# EAGLE board brd1 (EAGLE 6.4)
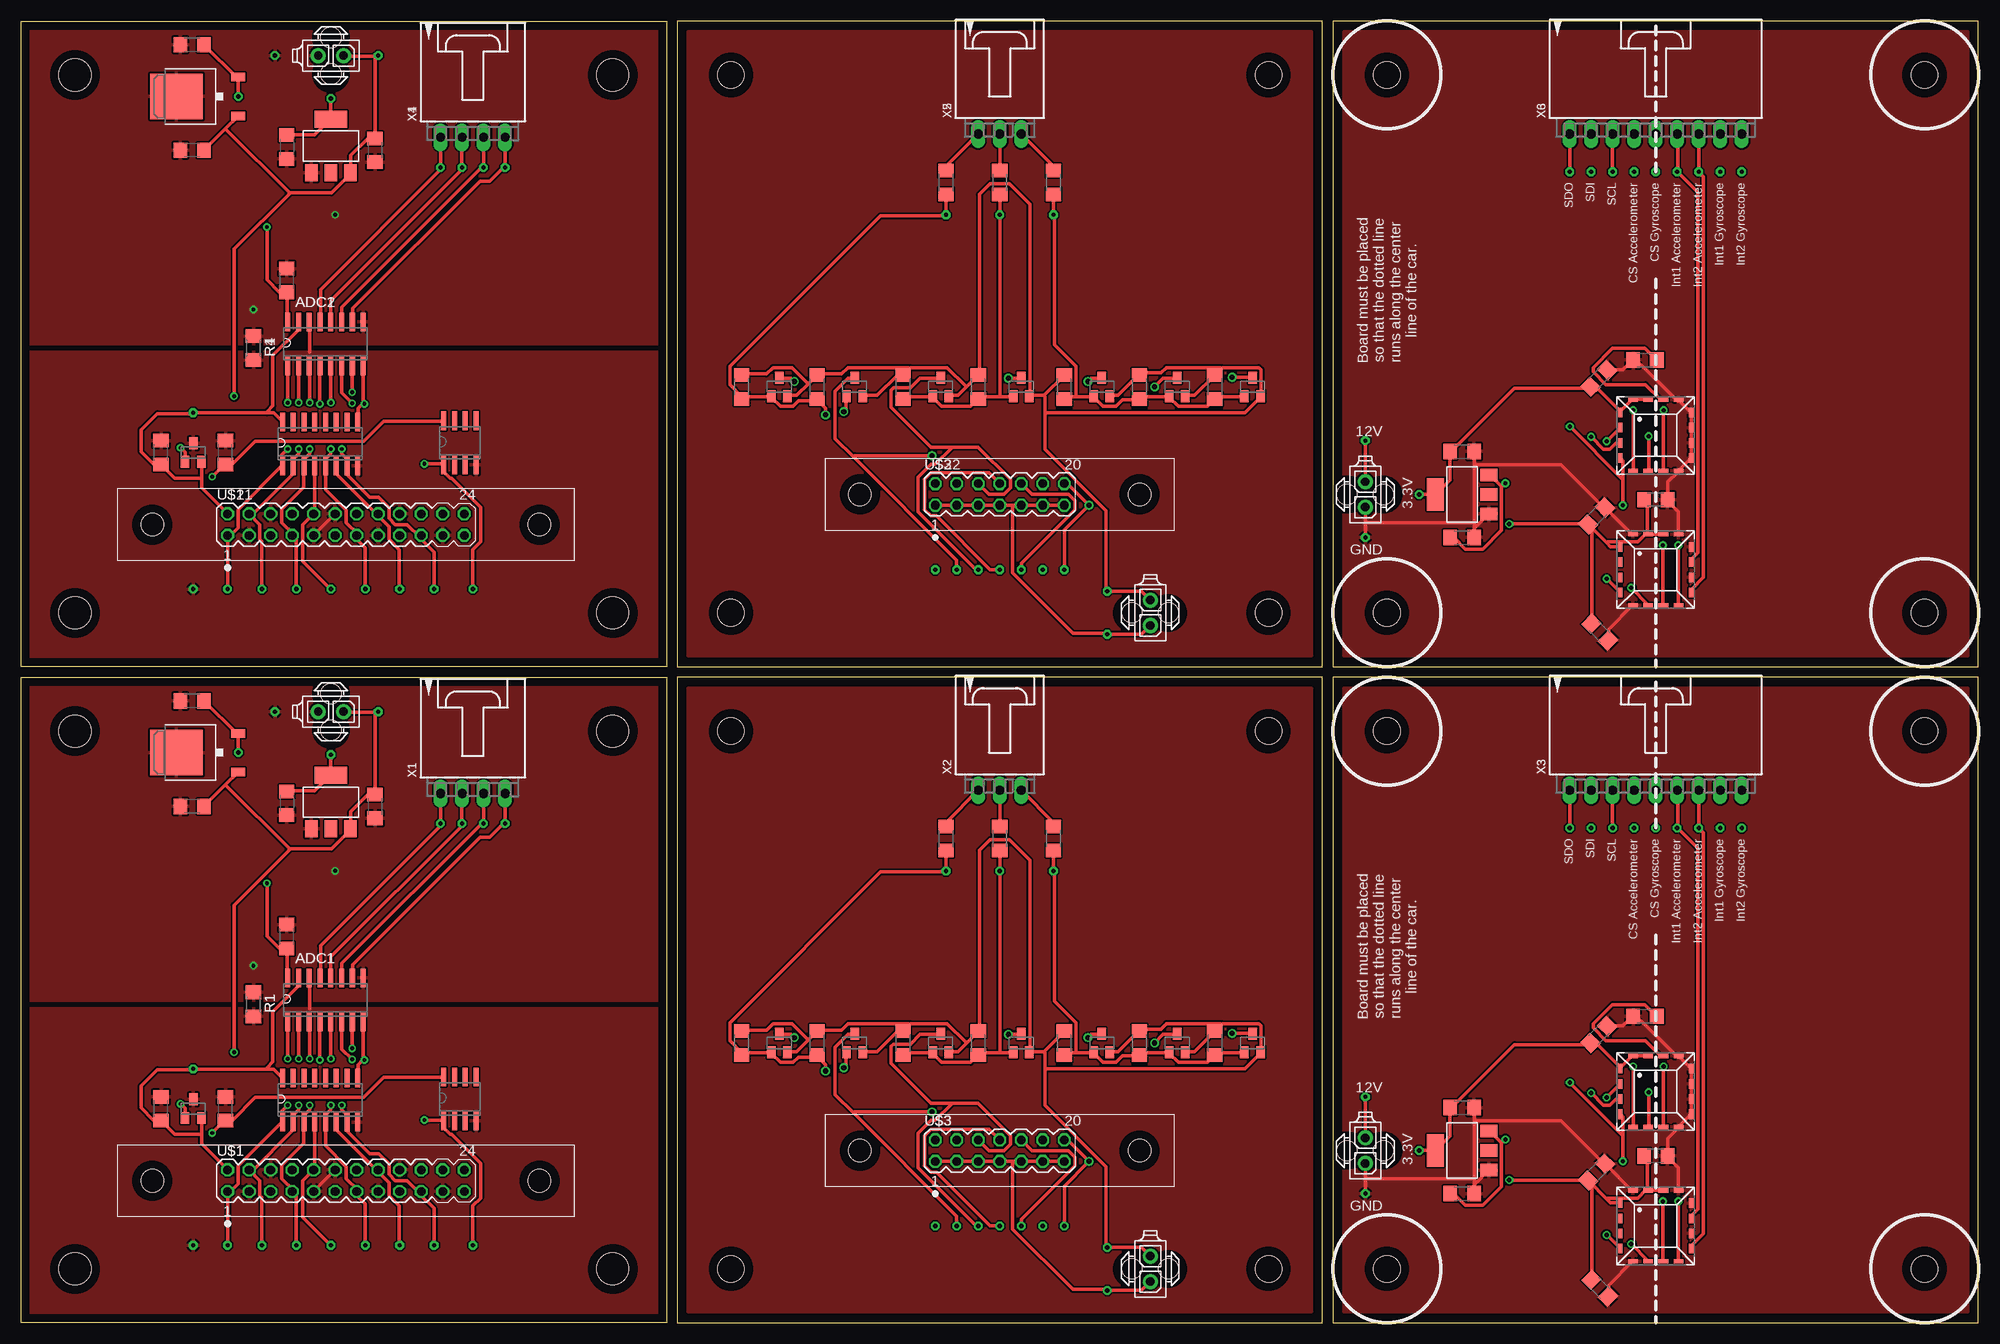
[diagram p0: board, top side]
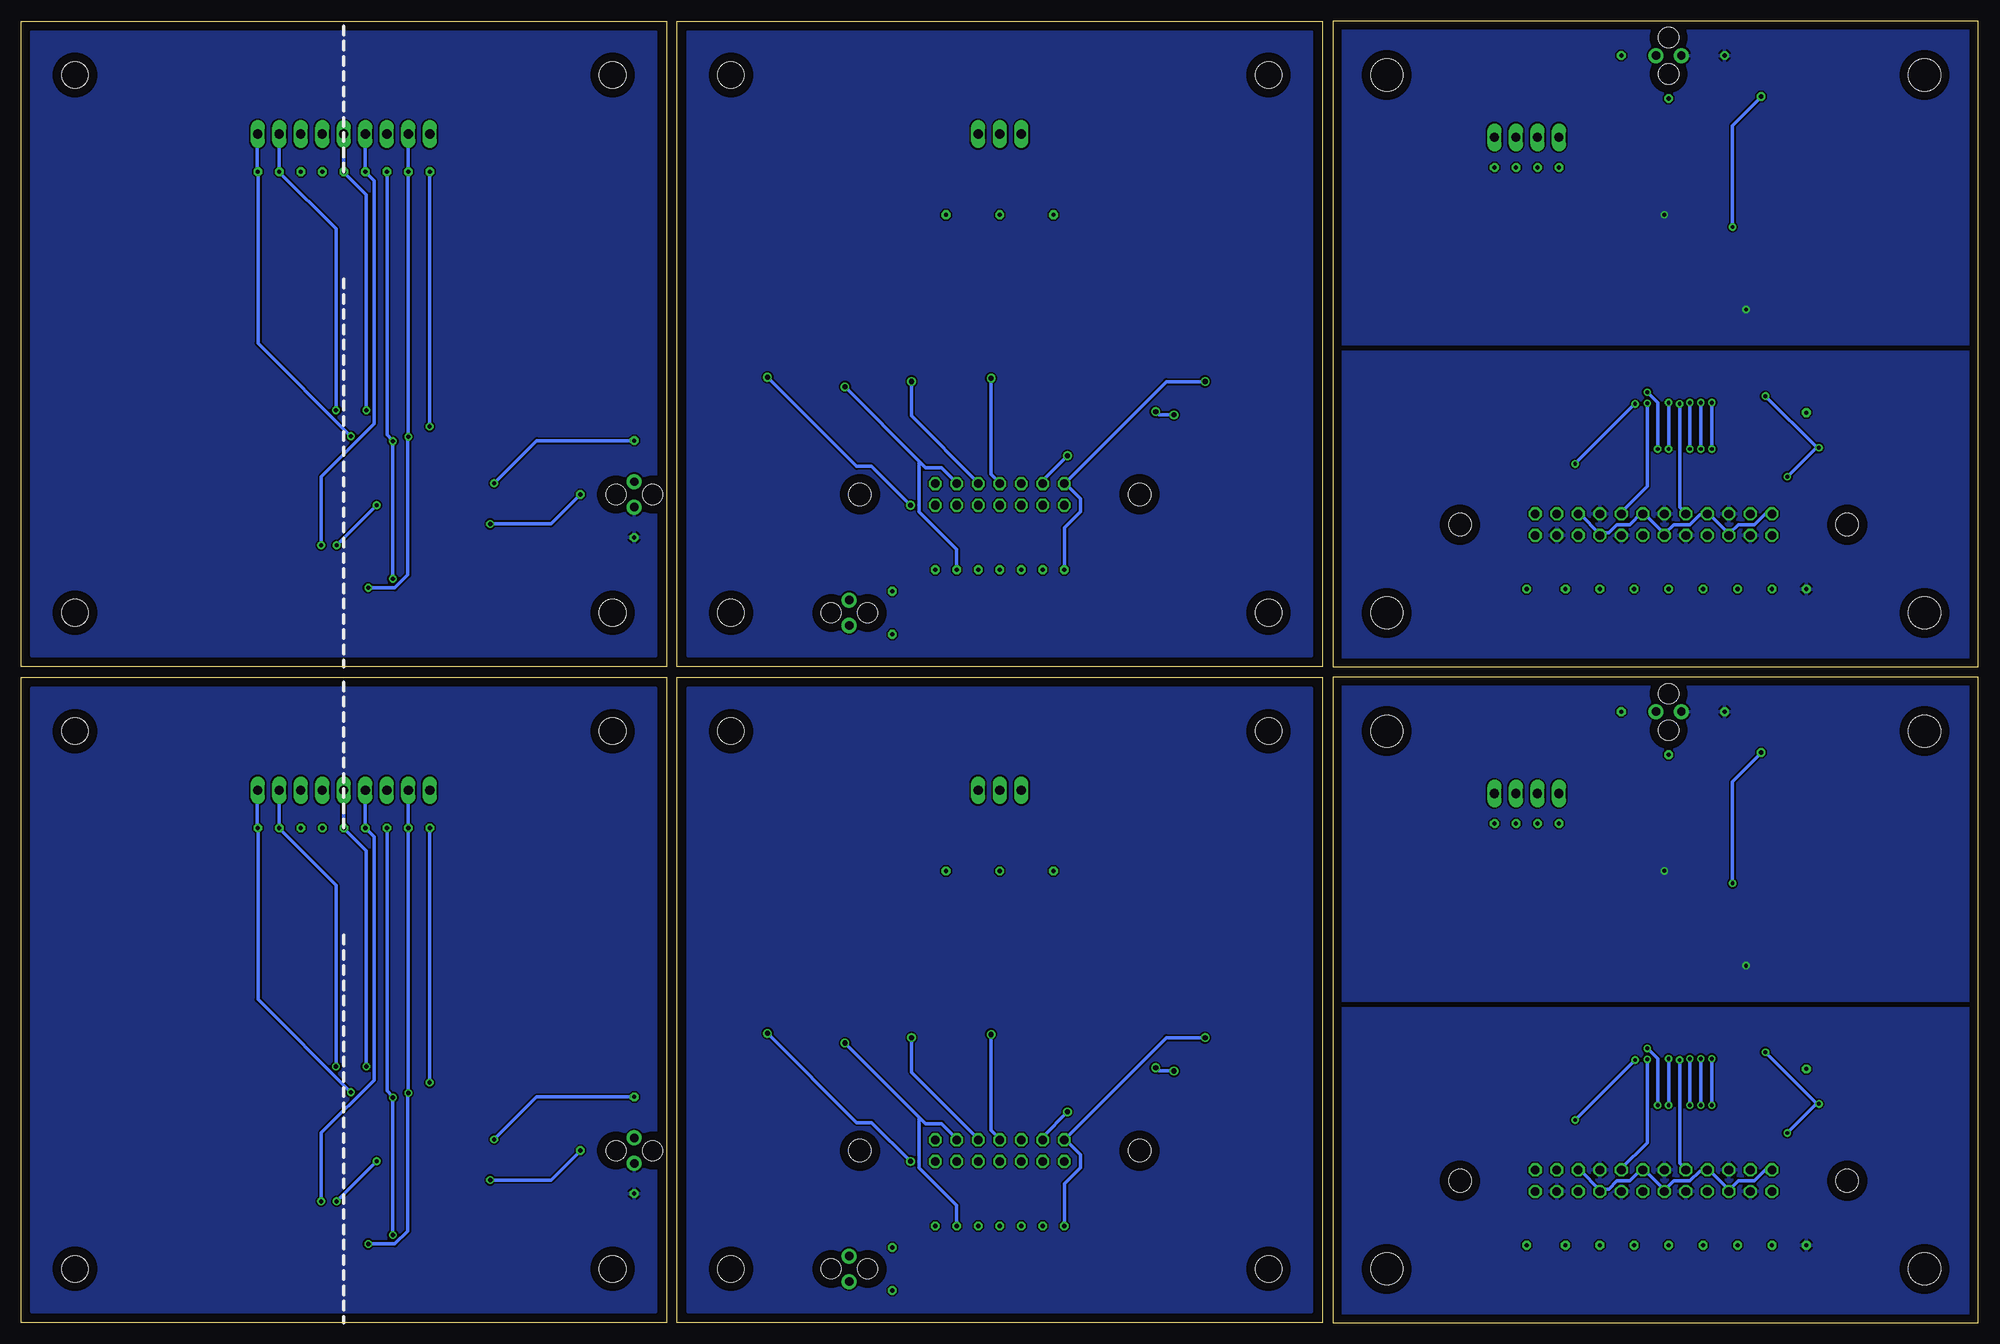
[diagram p1: board, bottom side, seen from below]

Size 231.14 x 153.67 mm. Coordinates in mm from the lower left corner, seen from the top.
Outline: 0,0 0,76.2 76.2,76.2 76.2,0 0,0
Outline: 77.47,0 153.67,0 153.67,76.2 77.47,76.2 77.47,0
Outline: 154.94,0 231.14,0 231.14,76.2 154.94,76.2 154.94,0
Outline: 0,77.47 0,153.67 76.2,153.67 76.2,77.47 0,77.47
Outline: 77.47,77.47 153.67,77.47 153.67,153.67 77.47,153.67 77.47,77.47
Outline: 154.94,77.47 231.14,77.47 231.14,153.67 154.94,153.67 154.94,77.47
Copper layers (1*16): Top 0.035mm / dielectric 1.5mm / Bottom 0.035mm
Design rules "default": minimum track width 10mil, minimum drill 0.6mm, track to track 8mil, track to pad 8mil, pad to pad 8mil, via to via 8mil, smd to smd 8mil, copper to edge 40mil, drill to drill 8mil, minimum pad ring 10mil, minimum via ring 8mil, stop-mask expansion 4mil, vias tented up to drill 0mil, thermal gap 10mil
Holes 3.81 mm at 69.85,69.85 6.35,69.85 69.85,6.35 6.35,6.35 69.85,147.32 6.35,147.32 69.85,83.82 6.35,83.82
Holes 3.17 mm at 83.82,6.35 147.32,6.35 83.82,69.85 147.32,69.85 161.29,6.35 224.79,69.85 161.29,69.85 224.79,6.35 83.82,83.82 147.32,83.82 83.82,147.32 147.32,147.32 161.29,83.82 224.79,147.32 161.29,147.32 224.79,83.82

## Footprints (pad centres in the part's own frame; a part is rotated, then mirrored left to right if it is on the bottom)
20MIL = drill 0.508 octagon: P$1 0,0
TO252 = smd 1 x 1.6: 1 -2.28,-4.8; 2 2.28,-4.8 | smd 5.4 x 6.2: 3 0,2.5
SOT23 = smd 1 x 1.4: 1 -0.95,-1.1; 2 0.95,-1.1; 3 0,1.1
C1206 = smd 1.6 x 1.8: 1 -1.4,0; 2 1.4,0
SO16 = smd 0.6 x 2.2: 1 -4.445,-2.6; 2 -3.175,-2.6; 3 -1.905,-2.6; 4 -0.635,-2.6; 5 0.635,-2.6; 6 1.905,-2.6; 7 3.175,-2.6; 8 4.445,-2.6; 9 4.445,2.6; 10 3.175,2.6; 11 1.905,2.6; 12 0.635,2.6; 13 -0.635,2.6; 14 -1.905,2.6; 15 -3.175,2.6; 16 -4.445,2.6
SOT223 = smd 1.5 x 2: 1 -2.3,-3.15; 2 0,-3.15; 3 2.3,-3.15 | smd 3.8 x 2: 4 0,3.15
794681-2 = drill 1 pad 1.778: 1 0,-1.5; 2 0,1.5 | hole 2.4: 2.13,0; -2.17,0
R1206 = smd 1.6 x 1.803: 1 -1.422,0; 2 1.422,0
MA22-2 = drill 1.016 octagon: 1 -11.43,-1.27; 2 -11.43,1.27; 3 -8.89,-1.27; 4 -8.89,1.27; 5 -6.35,-1.27; 6 -6.35,1.27; 7 -3.81,-1.27; 8 -3.81,1.27; 9 -1.27,-1.27; 10 -1.27,1.27; 11 1.27,-1.27; 12 1.27,1.27; 13 3.81,-1.27; 14 3.81,1.27; 15 6.35,-1.27; 16 6.35,1.27; 17 8.89,-1.27; 18 8.89,1.27; 19 11.43,-1.27; 20 11.43,1.27; 21 13.97,-1.27; 22 13.97,1.27; 23 16.51,-1.27; 24 16.51,1.27 | hole 2.692: -20.32,0; 25.4,0
SO-08 = smd 0.6 x 2.2: 1 -1.905,-2.6; 2 -0.635,-2.6; 3 0.635,-2.6; 4 1.905,-2.6; 5 1.905,2.6; 6 0.635,2.6; 7 -0.635,2.6; 8 -1.905,2.6
MA14-2 = drill 1.016 octagon: 1 -11.43,-1.27; 2 -11.43,1.27; 3 -8.89,-1.27; 4 -8.89,1.27; 5 -6.35,-1.27; 6 -6.35,1.27; 7 -3.81,-1.27; 8 -3.81,1.27; 9 -1.27,-1.27; 10 -1.27,1.27; 11 1.27,-1.27; 12 1.27,1.27; 13 3.81,-1.27; 14 3.81,1.27 | hole 2.692: -20.32,0; 12.7,0
LGA16 = smd 0.5 x 1.127: 1 -4.186,2.696; 2 -4.187,0.898; 3 -4.187,-0.898; 4 -4.187,-2.696; 9 4.186,-2.696; 10 4.187,-0.898; 11 4.187,0.898; 12 4.187,2.696 | smd 1.127 x 0.5: 5 -2.696,-4.186; 6 -0.898,-4.187; 7 0.898,-4.187; 8 2.696,-4.187; 13 2.696,4.186; 14 0.898,4.187; 15 -0.898,4.187; 16 -2.696,4.187
70553-04 = drill 1.092 long: 1 -3.81,-7.62; 2 -1.27,-7.62; 3 1.27,-7.62; 4 3.81,-7.62
70553-03 = drill 1.092 long: 1 -2.54,-7.62; 2 0,-7.62; 3 2.54,-7.62
70553-09 = drill 1.092 long: 1 -10.16,-7.62; 2 -7.62,-7.62; 3 -5.08,-7.62; 4 -2.54,-7.62; 5 0,-7.62; 6 2.54,-7.62; 7 5.08,-7.62; 8 7.62,-7.62; 9 10.16,-7.62

## Placement (x,y rotation side)
3.3V_TP  TESTPAD-20MIL  [20MIL]  36.58,67.06 0 top
3.3V_TP1  TESTPAD-20MIL  [20MIL]  36.58,144.53 0 top
5V  LM7805TV  [TO252]  20.83,67.31 90 top
5V1  LM7805TV  [TO252]  20.83,144.78 90 top
5V_TP  TESTPAD-20MIL  [20MIL]  25.65,67.31 0 top
5V_TP1  TESTPAD-20MIL  [20MIL]  25.65,144.78 0 top
5VREF  MAX6105  [SOT23]  20.32,25.27 0 top
5VREF1  MAX6105  [SOT23]  20.32,102.74 0 top
12V  TESTPAD-20MIL  [20MIL]  42.16,72.14 0 top
12V1  TESTPAD-20MIL  [20MIL]  128.27,3.81 0 top
12V2  TESTPAD-20MIL  [20MIL]  42.16,149.61 0 top
12V3  TESTPAD-20MIL  [20MIL]  128.27,81.28 0 top
317CAP1  1uF  [C1206]  41.78,60.96 270 top
317CAP2  1uF  [C1206]  31.37,61.34 270 top
317CAP3  1uF  [C1206]  41.78,138.43 270 top
317CAP4  1uF  [C1206]  31.37,138.81 270 top
6103CAP1  1uF  [C1206]  24.13,25.27 90 top
6103CAP2  1uF  [C1206]  16.51,25.27 90 top
6103CAP3  1uF  [C1206]  24.13,102.74 90 top
6103CAP4  1uF  [C1206]  16.51,102.74 90 top
7805CAP1  .33uF  [C1206]  20.19,60.96 180 top
7805CAP2  1uF  [C1206]  20.19,73.41 180 top
7805CAP3  1uF  [C1206]  20.19,150.88 180 top
7805CAP4  .33uF  [C1206]  20.19,138.43 180 top
ADC1  MCP-3008  [SO16]  35.94,38.1 0 top
ADC2  MCP-3008  [SO16]  35.94,115.57 0 top
ADC_CAP1  .1uF  [C1206]  31.37,45.59 90 top
ADC_CAP2  .1uF  [C1206]  31.37,123.06 90 top
AGND  TESTPAD-20MIL  [20MIL]  20.32,9.14 0 top
AGND1  TESTPAD-20MIL  [20MIL]  20.32,86.61 0 top
B  TESTPAD-20MIL  [20MIL]  121.92,53.34 0 top
B1  TESTPAD-20MIL  [20MIL]  121.92,130.81 0 top
BC  TESTPAD-20MIL  [20MIL]  120.65,11.43 0 top
BC1  TESTPAD-20MIL  [20MIL]  120.65,88.9 0 top
BL  TESTPAD-20MIL  [20MIL]  118.11,11.43 0 top
BL1  TESTPAD-20MIL  [20MIL]  118.11,88.9 0 top
BLC  TESTPAD-20MIL  [20MIL]  115.57,53.34 0 top
BLC1  TESTPAD-20MIL  [20MIL]  115.57,130.81 0 top
BLINKER-L1  PMV56XN215  [SOT23]  118.11,33.02 0 top
BLINKER-L2  PMV56XN215  [SOT23]  108.58,33.02 0 top
BLINKER-L3  PMV56XN215  [SOT23]  118.11,110.49 0 top
BLINKER-L4  PMV56XN215  [SOT23]  108.58,110.49 0 top
BLINKER-R1  PMV56XN215  [SOT23]  98.42,33.02 0 top
BLINKER-R2  PMV56XN215  [SOT23]  89.53,33.02 0 top
BLINKER-R3  PMV56XN215  [SOT23]  98.42,110.49 0 top
BLINKER-R4  PMV56XN215  [SOT23]  89.53,110.49 0 top
BLLB  TESTPAD-20MIL  [20MIL]  113.03,11.43 0 top
BLLB1  TESTPAD-20MIL  [20MIL]  113.03,88.9 0 top
BLLF  TESTPAD-20MIL  [20MIL]  115.57,11.43 0 top
BLLF1  TESTPAD-20MIL  [20MIL]  115.57,88.9 0 top
BLRB  TESTPAD-20MIL  [20MIL]  107.95,11.43 0 top
BLRB1  TESTPAD-20MIL  [20MIL]  107.95,88.9 0 top
BLRF  TESTPAD-20MIL  [20MIL]  110.49,11.43 0 top
BLRF1  TESTPAD-20MIL  [20MIL]  110.49,88.9 0 top
BR  TESTPAD-20MIL  [20MIL]  123.19,11.43 0 top
BR1  TESTPAD-20MIL  [20MIL]  123.19,88.9 0 top
BRAKE-C1  N-CHANNEL_MOSFETPMV56XN,215  [SOT23]  136.53,33.02 0 top
BRAKE-C2  N-CHANNEL_MOSFETPMV56XN,215  [SOT23]  136.53,110.49 0 top
BRAKE-L1  PMV56XN215  [SOT23]  127.64,33.02 0 top
BRAKE-L2  PMV56XN215  [SOT23]  127.64,110.49 0 top
BRAKE-R1  PMV56XN215  [SOT23]  145.41,33.02 0 top
BRAKE-R2  PMV56XN215  [SOT23]  145.41,110.49 0 top
BRC  TESTPAD-20MIL  [20MIL]  109.22,53.34 0 top
BRC1  TESTPAD-20MIL  [20MIL]  109.22,130.81 0 top
C1  1uF  [C1206]  170.18,92.71 0 top
C1_1  10nF 25V  [C1206]  191.77,113.67 0 top
C1_20  10nF 25V  [C1206]  191.77,36.2 0 top
C2  1uF  [C1206]  170.18,102.87 0 top
C2_1  10uF  [C1206]  193.04,97.16 180 top
C2_20  10uF  [C1206]  193.04,19.68 180 top
C3_1  100nF  [C1206]  186.32,111.5 225 top
C3_20  100nF  [C1206]  186.32,34.03 225 top
C4_1  10uF  [C1206]  186.43,81.54 135 top
C4_331  10uF  [C1206]  186.43,4.07 135 top
C5_1  100nF  [C1206]  186.06,95.25 225 top
C5_331  100nF  [C1206]  186.06,17.78 225 top
C6  1uF  [C1206]  170.18,15.24 0 top
C7  1uF  [C1206]  170.18,25.4 0 top
GND  TESTPAD-20MIL  [20MIL]  29.97,72.14 0 top
GND1  TESTPAD-20MIL  [20MIL]  128.27,8.89 0 top
GND2  TESTPAD-20MIL  [20MIL]  29.97,149.61 0 top
GND3  TESTPAD-20MIL  [20MIL]  128.27,86.36 0 top
IC1  LD117AS12TR  [SOT223]  36.58,61.47 0 top
IC2  LD117AS18TR  [SOT223]  170.18,20.32 90 top
IC3  LD117AS12TR  [SOT223]  36.58,138.94 0 top
IC4  LD117AS18TR  [SOT223]  170.18,97.79 90 top
IN1  TESTPAD-20MIL  [20MIL]  24.38,9.14 0 top
IN2  TESTPAD-20MIL  [20MIL]  28.45,9.14 0 top
IN3  TESTPAD-20MIL  [20MIL]  32.51,9.14 0 top
IN4  TESTPAD-20MIL  [20MIL]  36.58,9.14 0 top
IN5  TESTPAD-20MIL  [20MIL]  40.64,9.14 0 top
IN6  TESTPAD-20MIL  [20MIL]  44.7,9.14 0 top
IN7  TESTPAD-20MIL  [20MIL]  48.77,9.14 0 top
IN8  TESTPAD-20MIL  [20MIL]  53.34,9.14 0 top
IN9  TESTPAD-20MIL  [20MIL]  24.38,86.61 0 top
IN10  TESTPAD-20MIL  [20MIL]  28.45,86.61 0 top
IN11  TESTPAD-20MIL  [20MIL]  32.51,86.61 0 top
IN12  TESTPAD-20MIL  [20MIL]  36.58,86.61 0 top
IN13  TESTPAD-20MIL  [20MIL]  40.64,86.61 0 top
IN14  TESTPAD-20MIL  [20MIL]  44.7,86.61 0 top
IN15  TESTPAD-20MIL  [20MIL]  48.77,86.61 0 top
IN16  TESTPAD-20MIL  [20MIL]  53.34,86.61 0 top
J1  794681-2  [794681-2]  36.58,72.14 90 top
J2  794681-2  [794681-2]  133.35,6.35 0 top
J3  794681-2  [794681-2]  158.75,20.32 0 top
J4  794681-2  [794681-2]  36.58,149.61 90 top
J5  794681-2  [794681-2]  133.35,83.82 0 top
J6  794681-2  [794681-2]  158.75,97.79 0 top
R1  0  [R1206]  27.43,37.59 270 top
R2  1k  [R1206]  132.08,33.02 270 top
R3  1k  [R1206]  140.97,33.02 270 top
R4  0  [R1206]  27.43,115.06 270 top
R5  1k  [R1206]  113.03,33.02 270 top
R6  1k  [R1206]  104.14,33.02 270 top
R7  1k  [R1206]  109.22,57.15 90 top
R8  1k  [R1206]  132.08,110.49 270 top
R9  1k  [R1206]  121.92,57.15 270 top
R10  1k  [R1206]  115.57,57.15 270 top
R11  1k  [R1206]  140.97,110.49 270 top
R12  1k  [R1206]  113.03,110.49 270 top
R13  1k  [R1206]  104.14,110.49 270 top
R14  1k  [R1206]  93.98,33.02 270 top
R15  1k  [R1206]  85.09,33.02 270 top
R16  1k  [R1206]  123.19,33.02 270 top
R17  1k  [R1206]  93.98,110.49 270 top
R18  1k  [R1206]  85.09,110.49 270 top
R19  1k  [R1206]  123.19,110.49 270 top
R20  1k  [R1206]  109.22,134.62 90 top
R21  1k  [R1206]  121.92,134.62 270 top
R22  1k  [R1206]  115.57,134.62 270 top
SPI_CLK  TESTPAD-20MIL  [20MIL]  49.53,58.93 0 top
SPI_CLK1  TESTPAD-20MIL  [20MIL]  49.53,136.4 0 top
SPI_CS1  TESTPAD-20MIL  [20MIL]  57.15,58.93 0 top
SPI_CS2  TESTPAD-20MIL  [20MIL]  57.15,136.4 0 top
SPI_DIN  TESTPAD-20MIL  [20MIL]  54.61,58.93 0 top
SPI_DIN1  TESTPAD-20MIL  [20MIL]  54.61,136.4 0 top
SPI_DOUT  TESTPAD-20MIL  [20MIL]  52.07,58.93 0 top
SPI_DOUT1  TESTPAD-20MIL  [20MIL]  52.07,136.4 0 top
U$1  AMP_LATCH_22  [MA22-2]  35.81,16.76 0 top
U$2  LM35  [SO-08]  51.82,26.42 0 top
U$3  AMP_LATCH_14  [MA14-2]  119.38,20.32 0 top
U$4  L3GD20  [LGA16]  193.04,27.3 0 top
U$5  LIS331HH  [LGA16]  193.04,11.43 0 top
U$6  SP720APP  [SO16]  35.31,26.29 0 top
U$7  TESTPAD-20MIL  [20MIL]  182.88,58.42 0 top
U$8  TESTPAD-20MIL  [20MIL]  185.42,58.42 0 top
U$9  TESTPAD-20MIL  [20MIL]  187.96,58.42 0 top
U$10  TESTPAD-20MIL  [20MIL]  190.5,58.42 0 top
U$11  TESTPAD-20MIL  [20MIL]  193.04,58.42 0 top
U$12  TESTPAD-20MIL  [20MIL]  195.58,58.42 0 top
U$13  TESTPAD-20MIL  [20MIL]  198.12,58.42 0 top
U$14  TESTPAD-20MIL  [20MIL]  200.66,58.42 0 top
U$15  TESTPAD-20MIL  [20MIL]  203.2,58.42 0 top
U$16  TESTPAD-20MIL  [20MIL]  158.75,26.67 0 top
U$17  TESTPAD-20MIL  [20MIL]  158.75,15.24 0 top
U$18  TESTPAD-20MIL  [20MIL]  165.1,20.32 0 top
U$19  SP720APP  [SO16]  35.31,103.76 0 top
U$20  LM35  [SO-08]  51.82,103.89 0 top
U$21  AMP_LATCH_22  [MA22-2]  35.81,94.23 0 top
U$22  AMP_LATCH_14  [MA14-2]  119.38,97.79 0 top
U$23  L3GD20  [LGA16]  193.04,104.78 0 top
U$24  LIS331HH  [LGA16]  193.04,88.9 0 top
U$25  TESTPAD-20MIL  [20MIL]  182.88,135.89 0 top
U$26  TESTPAD-20MIL  [20MIL]  185.42,135.89 0 top
U$27  TESTPAD-20MIL  [20MIL]  187.96,135.89 0 top
U$28  TESTPAD-20MIL  [20MIL]  190.5,135.89 0 top
U$29  TESTPAD-20MIL  [20MIL]  193.04,135.89 0 top
U$30  TESTPAD-20MIL  [20MIL]  195.58,135.89 0 top
U$31  TESTPAD-20MIL  [20MIL]  198.12,135.89 0 top
U$32  TESTPAD-20MIL  [20MIL]  200.66,135.89 0 top
U$33  TESTPAD-20MIL  [20MIL]  203.2,135.89 0 top
U$34  TESTPAD-20MIL  [20MIL]  158.75,104.14 0 top
U$35  TESTPAD-20MIL  [20MIL]  158.75,92.71 0 top
U$36  TESTPAD-20MIL  [20MIL]  165.1,97.79 0 top
VREF_TP  TESTPAD-20MIL  [20MIL]  20.32,29.97 0 top
VREF_TP1  TESTPAD-20MIL  [20MIL]  20.32,107.44 0 top
X1  C-GRID-04-70553  [70553-04]  53.34,70.1 0 top
X2  C-GRID-03-70553  [70553-03]  115.57,70.48 0 top
X3  C-GRID-09-70553  [70553-09]  193.04,70.48 0 top
X4  C-GRID-04-70553  [70553-04]  53.34,147.57 0 top
X5  C-GRID-03-70553  [70553-03]  115.57,147.96 0 top
X6  C-GRID-09-70553  [70553-09]  193.04,147.96 0 top

## Library data of the parts
3.3V_TP 3.3V_TP1 5V_TP 5V_TP1 12V 12V1-12V3 AGND AGND1 B B1 BC BC1 BL BL1 BLC BLC1 BLLB BLLB1 BLLF BLLF1 BLRB BLRB1 BLRF BLRF1 BR BR1 BRC BRC1 GND GND1-GND3 IN1-IN16 SPI_CLK SPI_CLK1 SPI_CS1 SPI_CS2 SPI_DIN SPI_DIN1 SPI_DOUT SPI_DOUT1 U$7-U$18 U$25-U$36 VREF_TP VREF_TP1 = LTC6803
5V 5V1 = linear
5VREF 5VREF1 ADC1 ADC2 U$2 U$6 U$19 U$20 = SolarJacketsADC
317CAP1-317CAP4 6103CAP1-6103CAP4 7805CAP1-7805CAP4 ADC_CAP1 ADC_CAP2 C1 C1_1 C1_20 C2 C2_1 C2_20 C3_1 C3_20 C4_1 C4_331 C5_1 C5_331 C6 C7 R1 R4 = rcl
BLINKER-L1-BLINKER-L4 BLINKER-R1-BLINKER-R4 BRAKE-C1 BRAKE-C2 BRAKE-L1 BRAKE-L2 BRAKE-R1 BRAKE-R2 = SolarJacketsADC; PART_NUM: PMV56XN,215
IC1-IC4 = v-reg
J1-J6 = con-amp
R2 R3 R5-R22 = SolarJacketsADC; PART_NUM: CR1206-FX-1001GLF
U$1 U$3-U$5 U$21-U$24 = SolarJackets_Common
X1-X6 = con-molex; OC_FARNELL: unknown; OC_NEWARK: unknown

## Nets
3.3V: 3.3V_TP.P$1 317CAP2.1 IC1.4
3.3V1: C2_20.2 C3_20.2 C4_331.2 C5_331.2 C7.1 IC2.4 U$4.1 U$4.15 U$4.16 U$5.1 U$5.14 U$5.15 U$18.P$1
3.3V2: 3.3V_TP1.P$1 317CAP4.1 IC3.4
3.3V3: C2.1 C2_1.2 C3_1.2 C4_1.2 C5_1.2 IC4.4 U$23.1 U$23.15 U$23.16 U$24.1 U$24.14 U$24.15 U$36.P$1
5V: 5V.2 5V_TP.P$1 7805CAP2.1 ADC1.16 ADC_CAP1.1
5V1: 5V1.2 5V_TP1.P$1 7805CAP3.1 ADC2.16 ADC_CAP2.1
12V: 5V.1 5VREF.1 12V.P$1 317CAP1.1 6103CAP1.1 7805CAP1.1 IC1.3 J1.1 U$2.8
12V1: 12V1.P$1 J2.1 U$3.1 U$3.3 U$3.5 U$3.7 U$3.9 U$3.11 U$3.13
12V2: C6.1 IC2.3 J3.2 U$16.P$1
12V3: 5V1.1 5VREF1.1 12V2.P$1 317CAP3.1 6103CAP3.1 7805CAP4.1 IC3.3 J4.1 U$20.8
12V4: 12V3.P$1 J5.1 U$22.1 U$22.3 U$22.5 U$22.7 U$22.9 U$22.11 U$22.13
12V5: C1.1 IC4.3 J6.2 U$34.P$1
AGND: 5VREF.3 6103CAP1.2 6103CAP2.2 ADC1.14 AGND.P$1 R1.2 U$1.3 U$1.6 U$1.9 U$1.12 U$1.15 U$1.18 U$1.21 U$2.4 U$6.8
AGND1: 5VREF1.3 6103CAP3.2 6103CAP4.2 ADC2.14 AGND1.P$1 R4.2 U$19.8 U$20.4 U$21.3 U$21.6 U$21.9 U$21.12 U$21.15 U$21.18 U$21.21
BLINKER_L: BLC.P$1 BLINKER-L1.1 BLINKER-L2.1 R5.2 R6.2 R10.2
BLINKER_L1: BLC1.P$1 BLINKER-L3.1 BLINKER-L4.1 R12.2 R13.2 R22.2
BLINKER_L_BACK_-: BLINKER-L2.3 BLLB.P$1 U$3.6
BLINKER_L_BACK_-1: BLINKER-L4.3 BLLB1.P$1 U$22.6
BLINKER_L_FRONT_-: BLINKER-L1.3 BLLF.P$1 U$3.8
BLINKER_L_FRONT_-1: BLINKER-L3.3 BLLF1.P$1 U$22.8
BLINKER_R: BLINKER-R1.1 BLINKER-R2.1 BRC.P$1 R7.1 R14.2 R15.2
BLINKER_R1: BLINKER-R3.1 BLINKER-R4.1 BRC1.P$1 R17.2 R18.2 R20.1
BLINKER_R_BACK_-: BLINKER-R2.3 BLRB.P$1 U$3.2
BLINKER_R_BACK_-1: BLINKER-R4.3 BLRB1.P$1 U$22.2
BLINKER_R_FRONT_-: BLINKER-R1.3 BLRF.P$1 U$3.4
BLINKER_R_FRONT_-1: BLINKER-R3.3 BLRF1.P$1 U$22.4
BRAKE: B.P$1 BRAKE-C1.1 BRAKE-L1.1 BRAKE-R1.1 R2.2 R3.2 R9.2 R16.2
BRAKE1: B1.P$1 BRAKE-C2.1 BRAKE-L2.1 BRAKE-R2.1 R8.2 R11.2 R19.2 R21.2
BRAKE_C_-: BC.P$1 BRAKE-C1.3 U$3.12
BRAKE_C_-1: BC1.P$1 BRAKE-C2.3 U$22.12
BRAKE_L_-: BL.P$1 BRAKE-L1.3 U$3.10
BRAKE_L_-1: BL1.P$1 BRAKE-L2.3 U$22.10
BRAKE_R_-: BR.P$1 BRAKE-R1.3 U$3.14
BRAKE_R_-1: BR1.P$1 BRAKE-R2.3 U$22.14
CS_ACCEL: U$5.8 U$10.P$1 X3.4
CS_ACCEL1: U$24.8 U$28.P$1 X6.4
CS_GYRO: U$4.5 U$11.P$1 X3.5
CS_GYRO1: U$23.5 U$29.P$1 X6.5
GND: 5V.3 317CAP1.2 317CAP2.2 7805CAP1.2 7805CAP2.2 ADC1.9 ADC_CAP1.2 GND.P$1 IC1.1 J1.2 R1.1
GND1: BLINKER-L1.2 BLINKER-L2.2 BLINKER-R1.2 BLINKER-R2.2 BRAKE-C1.2 BRAKE-L1.2 BRAKE-R1.2 GND1.P$1 J2.2 R2.1 R3.1 R5.1 R6.1 R14.1 R15.1 R16.1
GND2: C1_20.1 C2_20.1 C3_20.1 C4_331.1 C5_331.1 C6.2 C7.2 IC2.1 J3.1 U$4.8 U$4.9 U$4.10 U$4.11 U$4.12 U$4.13 U$5.5 U$5.10 U$5.12 U$5.13 U$5.16 U$17.P$1
GND3: 5V1.3 317CAP3.2 317CAP4.2 7805CAP3.2 7805CAP4.2 ADC2.9 ADC_CAP2.2 GND2.P$1 IC3.1 J4.2 R4.1
GND4: BLINKER-L3.2 BLINKER-L4.2 BLINKER-R3.2 BLINKER-R4.2 BRAKE-C2.2 BRAKE-L2.2 BRAKE-R2.2 GND3.P$1 J5.2 R8.1 R11.1 R12.1 R13.1 R17.1 R18.1 R19.1
GND5: C1.2 C1_1.1 C2.2 C2_1.1 C3_1.1 C4_1.1 C5_1.1 IC4.1 J6.1 U$23.8 U$23.9 U$23.10 U$23.11 U$23.12 U$23.13 U$24.5 U$24.10 U$24.12 U$24.13 U$24.16 U$35.P$1
IN1: ADC1.1 IN1.P$1 U$1.1 U$6.1
IN2: ADC1.2 IN2.P$1 U$1.4 U$6.2
IN3: ADC1.3 IN3.P$1 U$1.7 U$6.3
IN4: ADC1.4 IN4.P$1 U$1.10 U$6.4
IN5: ADC1.5 IN5.P$1 U$1.13 U$6.5
IN6: ADC1.6 IN6.P$1 U$1.16 U$6.6
IN7: ADC1.7 IN7.P$1 U$1.19 U$6.7
IN8: ADC1.8 IN8.P$1 U$2.1 U$6.9
IN9: ADC2.1 IN9.P$1 U$19.1 U$21.1
IN10: ADC2.2 IN10.P$1 U$19.2 U$21.4
IN11: ADC2.3 IN11.P$1 U$19.3 U$21.7
IN12: ADC2.4 IN12.P$1 U$19.4 U$21.10
IN13: ADC2.8 IN16.P$1 U$19.9 U$20.1
IN14: ADC2.7 IN15.P$1 U$19.7 U$21.19
IN15: ADC2.6 IN14.P$1 U$19.6 U$21.16
IN16: ADC2.5 IN13.P$1 U$19.5 U$21.13
INT1_ACCEL: U$5.11 U$12.P$1 X3.6
INT1_ACCEL1: U$24.11 U$30.P$1 X6.6
INT1_GYRO: U$4.7 U$14.P$1 X3.8
INT1_GYRO1: U$23.7 U$32.P$1 X6.8
INT2_ACCEL: U$5.9 U$13.P$1 X3.7
INT2_ACCEL1: U$24.9 U$31.P$1 X6.7
INT2_GYRO: U$4.6 U$15.P$1 X3.9
INT2_GYRO1: U$23.6 U$33.P$1 X6.9
N$1: R7.2 X2.1
N$2: R10.1 X2.2
N$3: R9.1 X2.3
N$5: C1_20.2 U$4.14
N$6: R20.2 X5.1
N$7: R22.1 X5.2
N$8: R21.1 X5.3
N$10: C1_1.2 U$23.14
SCL: U$4.2 U$5.4 U$9.P$1 X3.3
SCL1: U$23.2 U$24.4 U$27.P$1 X6.3
SDI: U$4.3 U$5.6 U$8.P$1 X3.2
SDI1: U$23.3 U$24.6 U$26.P$1 X6.2
SDO: U$4.4 U$5.7 U$7.P$1 X3.1
SDO1: U$23.4 U$24.7 U$25.P$1 X6.1
SPI_CLK: ADC1.13 SPI_CLK.P$1 X1.1
SPI_CLK1: ADC2.13 SPI_CLK1.P$1 X4.1
SPI_CS1: ADC1.10 SPI_CS1.P$1 X1.4
SPI_CS2: ADC2.10 SPI_CS2.P$1 X4.4
SPI_DIN: ADC1.11 SPI_DIN.P$1 X1.3
SPI_DIN1: ADC2.11 SPI_DIN1.P$1 X4.3
SPI_DOUT: ADC1.12 SPI_DOUT.P$1 X1.2
SPI_DOUT1: ADC2.12 SPI_DOUT1.P$1 X4.2
VREF: 5VREF.2 6103CAP2.1 ADC1.15 U$1.2 U$1.5 U$1.8 U$1.11 U$1.14 U$1.17 U$1.20 U$6.16 VREF_TP.P$1
VREF1: 5VREF1.2 6103CAP4.1 ADC2.15 U$19.16 U$21.2 U$21.5 U$21.8 U$21.11 U$21.14 U$21.17 U$21.20 VREF_TP1.P$1

## Tracks (layer width: path | path; a pad name or v marks a point on that pad's centre or on a via)
3.3V
  Top 0.406: 317CAP2.1 31.39,62.79 34.67,62.79 36.58,64.69 IC1.4 36.58,64.85 3.3V_TP.P$1
3.3V1  (via drill 0.51)
  Top 0.406: U$5.15 192.2,15.62 193.88,15.62 U$5.14 | U$5.15 192.05,15.77 192.05,19.28 191.67,19.66 C2_20.2 | 187.29,14.59 185.12,16.76 C5_331.2 | 187.29,14.59 187.71,14.17 188.85,14.17 U$5.1 | C4_331.2 185.5,5.11 185.5,16.15 C5_331.2 | U$5.15 191.9,15.7 190.91,14.71 187.4,14.71 187.29,14.59 | U$4.15 192.13,31.55 190.53,31.55 U$4.16 190.3,31.55 188.93,30.18 188.93,30.02 U$4.1 188.77,30.25 186.03,32.99 185.34,32.99 C3_20.2 185.19,32.84 176.35,32.84 168.96,25.45 C7.1 168.73,25.38 168.73,22.02 167.06,20.34 IC2.4 166.83,20.34 165.15,20.34 U$18.P$1 | v175.74,16.84 184.89,16.84 C5_331.2
  Bottom 0.406: v175.74,16.84 168.58,16.84 U$18.P$1
3.3V2
  Top 0.406: 317CAP4.1 31.39,140.26 34.67,140.26 36.58,142.16 IC3.4 36.58,142.32 3.3V_TP1.P$1
3.3V3  (via drill 0.51)
  Top 0.406: U$24.15 192.2,93.09 193.88,93.09 U$24.14 | U$24.15 192.05,93.24 192.05,96.75 191.67,97.13 C2_1.2 | 187.29,92.06 185.12,94.23 C5_1.2 | 187.29,92.06 187.71,91.64 188.85,91.64 U$24.1 | C4_1.2 185.5,82.58 185.5,93.62 C5_1.2 | U$24.15 191.9,93.17 190.91,92.18 187.4,92.18 187.29,92.06 | U$23.15 192.13,109.02 190.53,109.02 U$23.16 190.3,109.02 188.93,107.64 188.93,107.49 U$23.1 188.77,107.72 186.03,110.47 185.34,110.47 C3_1.2 185.19,110.31 176.35,110.31 168.96,102.92 C2.1 168.73,102.84 168.73,99.49 167.06,97.81 IC4.4 166.83,97.81 165.15,97.81 U$36.P$1 | v175.74,94.31 184.89,94.31 C5_1.2
  Bottom 0.406: v175.74,94.31 168.58,94.31 U$36.P$1
5V  (via drill 0.46)
  Top 0.406: ADC1.16 31.55,40.77 31.39,40.92 31.39,44.12 ADC_CAP1.1 31.17,44.2 30.48,44.2 29.03,45.64 v29.03,51.89 | 5V_TP.P$1 25.6,67.36 25.6,69.57 5V.2 25.45,69.57 21.64,73.38 7805CAP2.1
  Bottom 0.406: v29.03,51.89 29.03,63.86 25.6,67.28 5V_TP.P$1
5V1  (via drill 0.46)
  Top 0.406: ADC2.16 31.55,118.24 31.39,118.39 31.39,121.59 ADC_CAP2.1 31.17,121.67 30.48,121.67 29.03,123.11 v29.03,129.36 | 5V_TP1.P$1 25.6,144.83 25.6,147.04 5V1.2 25.45,147.04 21.64,150.85 7805CAP3.1
  Bottom 0.406: v29.03,129.36 29.03,141.33 25.6,144.75 5V_TP1.P$1
12V  (via drill 0.46)
  Top 0.406: v18.82,25.83 19.36,25.3 19.36,24.23 5VREF.1 | v22.55,22.4 24.08,23.93 6103CAP1.1 24.31,23.93 24.99,23.93 27.66,26.59 40.46,26.59 42.82,28.96 49.91,28.96 U$2.8 | 24.12,63.51 21.57,60.96 7805CAP1.1 | 24.12,63.51 25.6,65 5V.1 | J1.1 38.1,72.08 42.14,72.08 12V.P$1 41.83,71.93 41.83,62.56 317CAP1.1 41.76,62.33 40.92,62.33 38.94,60.35 38.94,58.37 IC1.3 38.86,58.14 36.65,55.93 31.7,55.93 | 31.7,55.93 24.23,63.4 24.12,63.51 | v25.15,31.93 25.15,49.3 31.62,55.78 31.7,55.93
  Bottom 0.406: v22.55,22.4 19.13,25.83 v18.82,25.83 19.2,25.98 v25.15,31.93
12V1
  Top 0.406: J2.1 133.35,4.83 132.33,3.81 12V1.P$1 128.14,3.94 124.21,3.94 117.09,11.05 117.09,18.92 117.09,19.05 | U$3.1 U$3.3 110.62,19.05 U$3.5 113.16,19.05 U$3.7 115.7,19.05 117.09,19.05 | 117.09,19.05 U$3.9 118.24,19.05 U$3.11 120.78,19.05 U$3.13
12V2  (via drill 0.51)
  Top 0.406: J3.2 U$16.P$1 | C6.1 169.19,15.24 170.56,13.87 172.62,13.87 174.83,16.08 174.83,21.26 | 174.83,21.26 173.53,22.55 173.38,22.55 IC2.3 | v175.28,21.64 174.98,21.34 174.83,21.26
  Bottom 0.406: U$16.P$1 170.26,26.67 v175.28,21.64
12V3  (via drill 0.46)
  Top 0.406: v18.82,103.3 19.36,102.77 19.36,101.7 5VREF1.1 | v22.55,99.87 24.08,101.4 6103CAP3.1 24.31,101.4 24.99,101.4 27.66,104.06 40.46,104.06 42.82,106.43 49.91,106.43 U$20.8 | 24.12,140.98 21.57,138.43 7805CAP4.1 | 24.12,140.98 25.6,142.47 5V1.1 | J4.1 38.1,149.56 42.14,149.56 12V2.P$1 41.83,149.4 41.83,140.03 317CAP3.1 41.76,139.8 40.92,139.8 38.94,137.82 38.94,135.84 IC3.3 38.86,135.61 36.65,133.4 31.7,133.4 | 31.7,133.4 24.23,140.87 24.12,140.98 | v25.15,109.4 25.15,126.77 31.62,133.25 31.7,133.4
  Bottom 0.406: v22.55,99.87 19.13,103.3 v18.82,103.3 19.2,103.45 v25.15,109.4
12V4
  Top 0.406: J5.1 133.35,82.3 132.33,81.28 12V3.P$1 128.14,81.41 124.21,81.41 117.09,88.52 117.09,96.39 117.09,96.52 | U$22.1 U$22.3 110.62,96.52 U$22.5 113.16,96.52 U$22.7 115.7,96.52 117.09,96.52 | 117.09,96.52 U$22.9 118.24,96.52 U$22.11 120.78,96.52 U$22.13
12V5  (via drill 0.51)
  Top 0.406: J6.2 U$34.P$1 | C1.1 169.19,92.71 170.56,91.34 172.62,91.34 174.83,93.55 174.83,98.73 | 174.83,98.73 173.53,100.03 173.38,100.03 IC4.3 | v175.28,99.11 174.98,98.81 174.83,98.73
  Bottom 0.406: U$34.P$1 170.26,104.14 v175.28,99.11
AGND
  Top 0.406: ADC1.14 34.06,40.69 34.06,37.26 34.06,37.08 | U$1.9 U$1.12
  pour Bottom: 0.51,37.08 0.51,0.51 75.69,0.51 75.69,37.08
  pour Top: 0.51,37.08 0.51,0.51 75.69,0.51 75.69,37.08
AGND1
  Top 0.406: ADC2.14 34.06,118.16 34.06,114.73 34.06,114.55 | U$21.9 U$21.12
  pour Bottom: 0.51,114.55 0.51,77.98 75.69,77.98 75.69,114.55
  pour Top: 0.51,114.55 0.51,77.98 75.69,77.98 75.69,114.55
BLINKER_L
  Top 0.406: R6.2 104.14,31.62 104.39,31.88 107.57,31.88 BLINKER-L2.1 107.7,31.75 108.71,30.73 112.14,30.73 112.9,31.5 R5.2 113.03,31.62 113.28,31.88 115.57,31.88 | R10.2 115.57,55.63 BLC.P$1 115.57,53.21 115.57,32 115.57,31.88 | 115.57,31.88 117.09,31.88 BLINKER-L1.1
BLINKER_L1
  Top 0.406: R13.2 104.14,109.09 104.39,109.35 107.57,109.35 BLINKER-L4.1 107.7,109.22 108.71,108.2 112.14,108.2 112.9,108.97 R12.2 113.03,109.09 113.28,109.35 115.57,109.35 | R22.2 115.57,133.1 BLC1.P$1 115.57,130.68 115.57,109.47 115.57,109.35 | 115.57,109.35 117.09,109.35 BLINKER-L3.1
BLINKER_L_BACK_-
  Top 0.406: 109.86,25.91 113.03,25.91 116.84,22.1 116.84,21.08 116.08,20.32 114.3,20.32 U$3.6 | 109.86,25.91 107.44,25.91 102.74,30.61 102.74,32.64 103,32.89 105.03,32.89 106.17,34.04 108.58,34.04 BLINKER-L2.3 | BLLB.P$1 112.78,11.43 105.92,18.29 105.92,22.35 107.44,23.88 107.95,23.88 109.86,25.78 109.86,25.91
BLINKER_L_BACK_-1
  Top 0.406: 109.86,103.38 113.03,103.38 116.84,99.57 116.84,98.55 116.08,97.79 114.3,97.79 U$22.6 | 109.86,103.38 107.44,103.38 102.74,108.08 102.74,110.11 103,110.36 105.03,110.36 106.17,111.51 108.58,111.51 BLINKER-L4.3 | BLLB1.P$1 112.78,88.9 105.92,95.76 105.92,99.82 107.44,101.35 107.95,101.35 109.86,103.25 109.86,103.38
BLINKER_L_FRONT_-  (via drill 0.61)
  Top 0.406: v116.59,34.04 118.11,34.04 BLINKER-L1.3 | BLLF.P$1 114.43,11.43 108.08,17.78 107.44,17.78 106.68,18.54 106.68,22.1 107.44,22.86 114.3,22.86 U$3.8
  Bottom 0.406: v116.59,34.04 116.59,22.73 115.57,21.72 U$3.8
BLINKER_L_FRONT_-1  (via drill 0.61)
  Top 0.406: v116.59,111.51 118.11,111.51 BLINKER-L3.3 | BLLF1.P$1 114.43,88.9 108.08,95.25 107.44,95.25 106.68,96.01 106.68,99.57 107.44,100.33 114.3,100.33 U$22.8
  Bottom 0.406: v116.59,111.51 116.59,100.2 115.57,99.19 U$22.8
BLINKER_R  (via drill 0.61)
  Top 0.406: v97.16,30.1 97.41,30.35 97.41,31.88 BLINKER-R1.1 | v95,29.72 95,30.48 93.98,31.5 R14.2 93.85,31.37 91.82,31.37 91.19,30.73 89.66,30.73 88.65,31.75 BLINKER-R2.1 88.52,31.88 85.34,31.88 85.09,31.62 R15.2 85.09,31.88 83.69,33.27 83.69,35.43 101.47,53.21 109.09,53.21 BRC.P$1 109.22,55.63 R7.1
  Bottom 0.406: v97.16,30.1 96.77,29.72 v95,29.72
BLINKER_R1  (via drill 0.61)
  Top 0.406: v97.16,107.57 97.41,107.82 97.41,109.35 BLINKER-R3.1 | v95,107.19 95,107.95 93.98,108.97 R17.2 93.85,108.84 91.82,108.84 91.19,108.2 89.66,108.2 88.65,109.22 BLINKER-R4.1 88.52,109.35 85.34,109.35 85.09,109.09 R18.2 85.09,109.35 83.69,110.74 83.69,112.9 101.47,130.68 109.09,130.68 BRC1.P$1 109.22,133.1 R20.1
  Bottom 0.406: v97.16,107.57 96.77,107.19 v95,107.19
BLINKER_R_BACK_-  (via drill 0.61)
  Top 0.406: v91.31,33.66 90.93,34.04 89.53,34.04 BLINKER-R2.3
  Bottom 0.406: v91.31,33.66 95.89,33.66 U$3.2 107.82,21.59 106.05,19.81 106.05,18.29 107.95,16.38 BLRB.P$1
BLINKER_R_BACK_-1  (via drill 0.61)
  Top 0.406: v91.31,111.12 90.93,111.51 89.53,111.51 BLINKER-R4.3
  Bottom 0.406: v91.31,111.12 95.89,111.12 U$22.2 107.82,99.06 106.05,97.28 106.05,95.76 107.95,93.85 BLRB1.P$1
BLINKER_R_FRONT_-  (via drill 0.61)
  Top 0.406: 98.3,24.77 110.49,12.57 BLRF.P$1 | 98.3,24.77 96.14,26.92 96.14,32.51 97.66,34.04 98.42,34.04 BLINKER-R1.3 | v107.57,24.89 98.42,24.89 98.3,24.77
  Bottom 0.406: U$3.4 110.49,21.97 v107.57,24.89
BLINKER_R_FRONT_-1  (via drill 0.61)
  Top 0.406: 98.3,102.23 110.49,90.04 BLRF1.P$1 | 98.3,102.23 96.14,104.39 96.14,109.98 97.66,111.51 98.42,111.51 BLINKER-R3.3 | v107.57,102.36 98.42,102.36 98.3,102.23
  Bottom 0.406: U$22.4 110.49,99.44 v107.57,102.36
BRAKE
  Top 0.406: BRAKE-R1.1 144.4,31.88 141.22,31.88 140.97,31.62 R3.2 140.84,31.5 140.08,30.73 136.65,30.73 135.64,31.75 BRAKE-C1.1 135.51,31.88 132.33,31.88 132.08,31.62 R2.2 131.95,31.5 130.05,31.5 129.29,30.73 127.76,30.73 126.75,31.75 BRAKE-L1.1 126.62,31.88 124.59,31.88 | R9.2 121.92,55.63 B.P$1 122.05,53.21 122.05,37.97 124.59,35.43 124.59,32 124.59,31.88 | 124.59,31.88 123.44,31.88 123.19,31.62 R16.2
BRAKE1
  Top 0.406: BRAKE-R2.1 144.4,109.35 141.22,109.35 140.97,109.09 R11.2 140.84,108.97 140.08,108.2 136.65,108.2 135.64,109.22 BRAKE-C2.1 135.51,109.35 132.33,109.35 132.08,109.09 R8.2 131.95,108.97 130.05,108.97 129.29,108.2 127.76,108.2 126.75,109.22 BRAKE-L2.1 126.62,109.35 124.59,109.35 | R21.2 121.92,133.1 B1.P$1 122.05,130.68 122.05,115.44 124.59,112.9 124.59,109.47 124.59,109.35 | 124.59,109.35 123.44,109.35 123.19,109.09 R19.2
BRAKE_C_-  (via drill 0.61)
  Top 0.406: v133.86,33.02 134.87,34.04 136.53,34.04 BRAKE-C1.3
  Bottom 0.406: 124.97,24.13 124.33,23.5 122.43,23.5 120.65,21.72 U$3.12 | 124.97,24.13 v133.86,33.02 | BC.P$1 120.65,13.84 125.09,18.29 125.09,24 124.97,24.13
BRAKE_C_-1  (via drill 0.61)
  Top 0.406: v133.86,110.49 134.87,111.51 136.53,111.51 BRAKE-C2.3
  Bottom 0.406: 124.97,101.6 124.33,100.97 122.43,100.97 120.65,99.19 U$22.12 | 124.97,101.6 v133.86,110.49 | BC1.P$1 120.65,91.31 125.09,95.76 125.09,101.47 124.97,101.6
BRAKE_L_-  (via drill 0.61)
  Top 0.406: v125.98,33.66 126.36,34.04 127.64,34.04 BRAKE-L1.3 | BL.P$1 118.11,12.19 124.46,18.54 124.46,19.56 123.7,20.32 119.38,20.32 U$3.10
  Bottom 0.406: v125.98,33.66 125.98,29.59 118.11,21.72 U$3.10
BRAKE_L_-1  (via drill 0.61)
  Top 0.406: v125.98,111.12 126.36,111.51 127.64,111.51 BRAKE-L2.3 | BL1.P$1 118.11,89.66 124.46,96.01 124.46,97.03 123.7,97.79 119.38,97.79 U$22.10
  Bottom 0.406: v125.98,111.12 125.98,107.06 118.11,99.19 U$22.10
BRAKE_R_-  (via drill 0.61)
  Top 0.406: v143,34.16 145.41,34.16 BRAKE-R1.3 | U$3.14 123.57,21.59 v126.11,19.05 125.98,18.92 123.19,16.13 BR.P$1
  Bottom 0.406: v143,34.16 132.46,23.62 130.68,23.62 v126.11,19.05
BRAKE_R_-1  (via drill 0.61)
  Top 0.406: v143,111.63 145.41,111.63 BRAKE-R2.3 | U$22.14 123.57,99.06 v126.11,96.52 125.98,96.39 123.19,93.6 BR1.P$1
  Bottom 0.406: v143,111.63 132.46,101.09 130.68,101.09 v126.11,96.52
CS_ACCEL  (via drill 0.51)
  Top 0.406: v195.71,14.33 195.71,7.32 U$5.8
  Bottom 0.406: v195.71,14.33 195.71,22.4 189.46,28.65 189.46,57.38 U$10.P$1 190.53,58.6 190.53,62.87 X3.4
CS_ACCEL1  (via drill 0.51)
  Top 0.406: v195.71,91.8 195.71,84.78 U$24.8
  Bottom 0.406: v195.71,91.8 195.71,99.87 189.46,106.12 189.46,134.85 U$28.P$1 190.53,136.07 190.53,140.34 X6.4
CS_GYRO  (via drill 0.51)
  Top 0.406: v190.37,30.25 190.37,23.16 U$4.5
  Bottom 0.406: v190.37,30.25 190.37,55.7 193.04,58.37 U$11.P$1 X3.5
CS_GYRO1  (via drill 0.51)
  Top 0.406: v190.37,107.72 190.37,100.64 U$23.5
  Bottom 0.406: v190.37,107.72 190.37,133.17 193.04,135.84 U$29.P$1 X6.5
GND  (via drill 0.46)
  other vias: 27.43,42.16 37.08,53.34
  pour Top: 0.51,75.69 0.51,38.1 75.69,38.1 75.69,75.69
  pour Bottom: 0.51,75.69 0.51,38.1 75.69,38.1 75.69,75.69
GND1
  Top 0.406: 92.96,33.4 93.98,34.42 R14.1 94.11,34.54 96.9,34.54 97.66,35.31 104.78,35.31 104.9,35.18 | 92.96,33.4 91.57,32 90.55,32 BLINKER-R2.2 | R15.1 85.09,34.54 88.01,34.54 88.77,35.31 91.06,35.31 92.84,33.53 92.96,33.4 | 111.63,33.02 113.03,34.42 R5.1 113.16,34.54 113.16,55.75 114.43,57.02 116.71,57.02 119.13,54.61 119.13,32.13 BLINKER-L1.2 119.13,32 120.78,32 | 111.63,33.02 110.62,32 109.6,32 BLINKER-L2.2 | BLINKER-R1.2 99.44,32 101.09,32 103.5,34.42 104.14,34.42 R6.1 104.27,34.54 104.9,35.18 | 104.9,35.18 105.03,35.31 109.35,35.31 111.51,33.15 111.63,33.02 | BRAKE-L1.2 128.65,32 129.54,32 132.08,34.54 R2.1 132.21,34.67 134.62,34.67 135.25,35.31 141.6,35.31 141.73,35.18 | BRAKE-C1.2 137.54,32 138.56,32 140.97,34.42 R3.1 141.1,34.54 141.73,35.18 | 141.73,35.18 141.86,35.31 146.18,35.31 146.43,35.05 146.43,32 BRAKE-R1.2 146.3,31.75 144.53,29.97 121.03,29.97 120.9,29.97 | 120.78,32 123.19,34.42 R16.1 | J2.2 133.35,7.87 132.33,8.89 GND1.P$1 128.14,9.02 128.14,18.41 120.9,25.65 120.9,29.97 | 120.9,29.97 120.9,31.88 120.78,32
GND2
  Top 0.406: J3.1 158.75,16.99 | 158.75,16.99 U$17.P$1 | 171.74,16.42 173.3,17.98 IC2.1 | 171.74,16.42 171.63,16.31 171.63,15.24 C6.2 | 171.63,16.99 171.63,16.54 171.74,16.42 | 171.63,16.99 171.63,23.85 | 171.63,23.85 171.63,25.38 C7.2 | 171.63,16.99 158.75,16.99 | U$5.16 190.3,15.54 187.1,18.75 C5_331.1 186.87,18.82 181.84,23.85 171.63,23.85 | C4_331.1 187.48,3.12 187.48,4.42 190.3,7.24 U$5.5 | C3_20.1 187.32,35.05 189.15,35.05 190.3,36.2 C1_20.1 190.53,36.12 190.83,36.12 195.63,31.32 U$4.13 195.78,31.47 197.16,30.1 U$4.12 197.23,29.95 197.23,28.35 U$4.11 197.23,26.59 U$4.10 197.23,26.36 197.23,24.77 U$4.9 197.16,24.54 195.78,23.16 U$4.8 195.63,22.94 194.49,21.79 194.49,19.74 C2_20.1 194.49,19.51 195.71,18.29 195.71,15.62 U$5.13
  pour Bottom: 156.21,74.93 156.21,1.27 229.87,1.27 229.87,74.93
  pour Top: 156.21,74.93 156.21,1.27 229.87,1.27 229.87,74.93
GND3  (via drill 0.46)
  other vias: 27.43,119.63 37.08,130.81
  pour Top: 0.51,153.16 0.51,115.57 75.69,115.57 75.69,153.16
  pour Bottom: 0.51,153.16 0.51,115.57 75.69,115.57 75.69,153.16
GND4
  Top 0.406: 92.96,110.87 93.98,111.89 R17.1 94.11,112.01 96.9,112.01 97.66,112.78 104.78,112.78 104.9,112.65 | 92.96,110.87 91.57,109.47 90.55,109.47 BLINKER-R4.2 | R18.1 85.09,112.01 88.01,112.01 88.77,112.78 91.06,112.78 92.84,111 92.96,110.87 | 111.63,110.49 113.03,111.89 R12.1 113.16,112.01 113.16,133.22 114.43,134.49 116.71,134.49 119.13,132.08 119.13,109.6 BLINKER-L3.2 119.13,109.47 120.78,109.47 | 111.63,110.49 110.62,109.47 109.6,109.47 BLINKER-L4.2 | BLINKER-R3.2 99.44,109.47 101.09,109.47 103.5,111.89 104.14,111.89 R13.1 104.27,112.01 104.9,112.65 | 104.9,112.65 105.03,112.78 109.35,112.78 111.51,110.62 111.63,110.49 | BRAKE-L2.2 128.65,109.47 129.54,109.47 132.08,112.01 R8.1 132.21,112.14 134.62,112.14 135.25,112.78 141.6,112.78 141.73,112.65 | BRAKE-C2.2 137.54,109.47 138.56,109.47 140.97,111.89 R11.1 141.1,112.01 141.73,112.65 | 141.73,112.65 141.86,112.78 146.18,112.78 146.43,112.52 146.43,109.47 BRAKE-R2.2 146.3,109.22 144.53,107.44 121.03,107.44 120.9,107.44 | 120.78,109.47 123.19,111.89 R19.1 | J5.2 133.35,85.34 132.33,86.36 GND3.P$1 128.14,86.49 128.14,95.89 120.9,103.12 120.9,107.44 | 120.9,107.44 120.9,109.35 120.78,109.47
GND5
  Top 0.406: J6.1 158.75,94.46 | 158.75,94.46 U$35.P$1 | 171.74,93.89 173.3,95.45 IC4.1 | 171.74,93.89 171.63,93.78 171.63,92.71 C1.2 | 171.63,94.46 171.63,94 171.74,93.89 | 171.63,94.46 171.63,101.32 | 171.63,101.32 171.63,102.84 C2.2 | 171.63,94.46 158.75,94.46 | U$24.16 190.3,93.02 187.1,96.22 C5_1.1 186.87,96.29 181.84,101.32 171.63,101.32 | C4_1.1 187.48,80.59 187.48,81.89 190.3,84.71 U$24.5 | C3_1.1 187.32,112.52 189.15,112.52 190.3,113.67 C1_1.1 190.53,113.59 190.83,113.59 195.63,108.79 U$23.13 195.78,108.94 197.16,107.57 U$23.12 197.23,107.42 197.23,105.82 U$23.11 197.23,104.06 U$23.10 197.23,103.83 197.23,102.23 U$23.9 197.16,102.01 195.78,100.64 U$23.8 195.63,100.41 194.49,99.26 194.49,97.21 C2_1.1 194.49,96.98 195.71,95.76 195.71,93.09 U$24.13
  pour Bottom: 156.21,152.4 156.21,78.74 229.87,78.74 229.87,152.4
  pour Top: 156.21,152.4 156.21,78.74 229.87,78.74 229.87,152.4
IN1  (via drill 0.46)
  Top 0.406: IN1.P$1 24.38,15.47 U$1.1 24.54,15.32 25.6,16.38 25.6,18.52 30.71,23.62 30.86,23.62 U$6.1 30.79,23.85 30.79,24.99 v31.47,25.68 | v31.47,31.17 31.47,35.43 ADC1.1
  Bottom 0.406: v31.47,25.68 v31.47,31.17
IN2  (via drill 0.46)
  Top 0.406: IN2.P$1 28.42,9.14 28.42,14.78 28.19,15.01 28.19,16.76 26.98,17.98 U$1.4 27.28,17.91 32.08,22.71 32.08,23.62 U$6.2 32.23,23.85 32.23,24.61 32.77,25.15 v32.77,25.68 | v32.77,31.17 32.77,35.43 ADC1.2
  Bottom 0.406: v32.77,25.68 v32.77,31.17
IN3  (via drill 0.46)
  Top 0.406: IN3.P$1 32.46,9.14 32.46,15.01 32,15.47 U$1.7 32.16,15.62 30.79,16.99 30.79,18.59 33.38,21.18 33.38,23.62 U$6.3 33.53,23.85 33.53,24.61 34.06,25.15 v34.06,25.68 | v34.06,31.17 34.06,35.43 ADC1.3
  Bottom 0.406: v34.06,25.68 v34.06,31.17
IN4  (via drill 0.46)
  Top 0.406: U$6.4 34.67,23.62 34.67,18.14 U$1.10 33.27,16.76 33.27,12.45 IN4.P$1 | v35.28,31.01 35.28,35.43 ADC1.4
  Bottom 0.406: v35.28,31.01 35.28,18.82 34.52,18.06 U$1.10
IN5  (via drill 0.46)
  Top 0.406: IN5.P$1 40.62,9.14 40.62,14.02 39.62,15.01 39.62,15.47 U$1.13 39.78,15.62 38.41,16.99 38.41,18.44 35.97,20.88 35.97,23.62 U$6.5 36.04,23.85 36.04,24.61 36.58,25.15 v36.58,25.68 | v36.58,31.17 36.58,35.43 ADC1.5
  Bottom 0.406: v36.58,25.68 v36.58,31.17
IN6  (via drill 0.46)
  Top 0.406: IN6.P$1 44.65,9.14 44.65,13.79 43.43,15.01 43.43,16.54 42.22,17.75 42.22,17.98 U$1.16 41.99,17.98 37.26,22.71 37.26,23.62 U$6.6 | v39.09,31.09 37.87,32.31 37.87,35.43 ADC1.6
  Bottom 0.406: v39.09,31.09 39.09,21.26 42.14,18.21 42.14,18.06 U$1.16
IN7  (via drill 0.46)
  Top 0.406: IN7.P$1 48.77,13.49 47.24,15.01 47.24,15.47 U$1.19 47.09,15.24 45.57,16.76 44.2,16.76 43.43,17.53 43.43,18.75 42.22,19.96 41.15,19.96 38.48,22.63 38.48,23.62 U$6.7 38.41,23.85 38.41,24.61 37.87,25.15 v37.87,25.68 | v39.09,32.38 39.09,35.43 ADC1.7
  Bottom 0.406: v39.09,32.38 37.87,31.17 v37.87,25.68
IN8  (via drill 0.46)
  Top 0.406: 40.39,31.09 39.78,30.48 39.78,28.96 U$6.9 | 40.39,31.09 40.39,35.43 ADC1.8 | IN8.P$1 53.34,13.79 54.25,14.71 54.25,18.82 50.83,22.25 50.67,22.25 49.91,23.01 49.91,23.77 U$2.1 49.76,23.93 v47.62,23.93 | v40.54,31.01 40.39,31.09
  Bottom 0.406: v47.62,23.93 v40.54,31.01
IN9  (via drill 0.46)
  Top 0.406: IN9.P$1 24.38,92.94 U$21.1 24.54,92.79 25.6,93.85 25.6,95.99 30.71,101.09 30.86,101.09 U$19.1 30.79,101.32 30.79,102.46 v31.47,103.15 | v31.47,108.64 31.47,112.9 ADC2.1
  Bottom 0.406: v31.47,103.15 v31.47,108.64
IN10  (via drill 0.46)
  Top 0.406: IN10.P$1 28.42,86.61 28.42,92.25 28.19,92.48 28.19,94.23 26.98,95.45 U$21.4 27.28,95.38 32.08,100.18 32.08,101.09 U$19.2 32.23,101.32 32.23,102.08 32.77,102.62 v32.77,103.15 | v32.77,108.64 32.77,112.9 ADC2.2
  Bottom 0.406: v32.77,103.15 v32.77,108.64
IN11  (via drill 0.46)
  Top 0.406: IN11.P$1 32.46,86.61 32.46,92.48 32,92.94 U$21.7 32.16,93.09 30.79,94.46 30.79,96.06 33.38,98.65 33.38,101.09 U$19.3 33.53,101.32 33.53,102.08 34.06,102.62 v34.06,103.15 | v34.06,108.64 34.06,112.9 ADC2.3
  Bottom 0.406: v34.06,103.15 v34.06,108.64
IN12  (via drill 0.46)
  Top 0.406: U$19.4 34.67,101.09 34.67,95.61 U$21.10 33.27,94.23 33.27,89.92 IN12.P$1 | v35.28,108.48 35.28,112.9 ADC2.4
  Bottom 0.406: v35.28,108.48 35.28,96.29 34.52,95.53 U$21.10
IN13  (via drill 0.46)
  Top 0.406: 40.39,108.56 39.78,107.95 39.78,106.43 U$19.9 | 40.39,108.56 40.39,112.9 ADC2.8 | IN16.P$1 53.34,91.26 54.25,92.18 54.25,96.29 50.83,99.72 50.67,99.72 49.91,100.48 49.91,101.24 U$20.1 49.76,101.4 v47.62,101.4 | v40.54,108.48 40.39,108.56
  Bottom 0.406: v47.62,101.4 v40.54,108.48
IN14  (via drill 0.46)
  Top 0.406: IN15.P$1 48.77,90.96 47.24,92.48 47.24,92.94 U$21.19 47.09,92.71 45.57,94.23 44.2,94.23 43.43,95 43.43,96.22 42.22,97.43 41.15,97.43 38.48,100.1 38.48,101.09 U$19.7 38.41,101.32 38.41,102.08 37.87,102.62 v37.87,103.15 | v39.09,109.86 39.09,112.9 ADC2.7
  Bottom 0.406: v39.09,109.86 37.87,108.64 v37.87,103.15
IN15  (via drill 0.46)
  Top 0.406: IN14.P$1 44.65,86.61 44.65,91.26 43.43,92.48 43.43,94 42.22,95.22 42.22,95.45 U$21.16 41.99,95.45 37.26,100.18 37.26,101.09 U$19.6 | v39.09,108.56 37.87,109.78 37.87,112.9 ADC2.6
  Bottom 0.406: v39.09,108.56 39.09,98.73 42.14,95.68 42.14,95.53 U$21.16
IN16  (via drill 0.46)
  Top 0.406: IN13.P$1 40.62,86.61 40.62,91.49 39.62,92.48 39.62,92.94 U$21.13 39.78,93.09 38.41,94.46 38.41,95.91 35.97,98.35 35.97,101.09 U$19.5 36.04,101.32 36.04,102.08 36.58,102.62 v36.58,103.15 | v36.58,108.64 36.58,112.9 ADC2.5
  Bottom 0.406: v36.58,103.15 v36.58,108.64
INT1_ACCEL
  Top 0.406: U$5.11 197.23,12.34 197.23,12.65 197.99,13.41 197.99,56.01 U$12.P$1 195.63,58.6 195.63,62.87 X3.6
INT1_ACCEL1
  Top 0.406: U$24.11 197.23,89.81 197.23,90.12 197.99,90.88 197.99,133.48 U$30.P$1 195.63,136.07 195.63,140.34 X6.6
INT1_GYRO  (via drill 0.51)
  Top 0.406: v193.95,30.25 193.95,23.16 U$4.7
  Bottom 0.406: v193.95,30.25 193.95,51.66 200.66,58.37 U$14.P$1 X3.8
INT1_GYRO1  (via drill 0.51)
  Top 0.406: v193.95,107.72 193.95,100.64 U$23.7
  Bottom 0.406: v193.95,107.72 193.95,129.13 200.66,135.84 U$32.P$1 X6.8
INT2_ACCEL
  Top 0.406: U$5.9 197.23,8.76 197.23,9.07 198.68,10.52 198.68,57.84 198.15,58.37 U$13.P$1 198.15,58.6 198.15,62.87 X3.7
INT2_ACCEL1
  Top 0.406: U$24.9 197.23,86.23 197.23,86.54 198.68,87.99 198.68,135.31 198.15,135.84 U$31.P$1 198.15,136.07 198.15,140.34 X6.7
INT2_GYRO  (via drill 0.51)
  Top 0.406: v192.2,27.2 192.2,23.16 U$4.6
  Bottom 0.406: v192.2,27.2 203.18,38.18 203.18,58.37 U$15.P$1 203.25,58.6 203.25,62.87 X3.9
INT2_GYRO1  (via drill 0.51)
  Top 0.406: v192.2,104.67 192.2,100.64 U$23.6
  Bottom 0.406: v192.2,104.67 203.18,115.65 203.18,135.84 U$33.P$1 203.25,136.07 203.25,140.34 X6.9
N$1
  Top 0.406: X2.1 109.22,59.05 109.22,58.67 R7.2
N$2
  Top 0.406: X2.2 115.57,58.67 R10.1
N$3
  Top 0.406: X2.3 121.92,59.05 121.92,58.67 R9.1
N$4
  pour Top: 78.74,74.93 78.74,1.27 152.4,1.27 152.4,74.93
  pour Bottom: 78.74,74.93 78.74,1.27 152.4,1.27 152.4,74.93
N$5
  Top 0.406: U$4.14 193.88,31.55 193.57,31.55 191.82,33.3 187.17,33.3 185.65,34.82 185.65,35.28 187.94,37.57 191.75,37.57 193.12,36.2 C1_20.2
N$6
  Top 0.406: X5.1 109.22,136.53 109.22,136.14 R20.2
N$7
  Top 0.406: X5.2 115.57,136.14 R22.1
N$8
  Top 0.406: X5.3 121.92,136.53 121.92,136.14 R21.1
N$9
  pour Top: 78.74,152.4 78.74,78.74 152.4,78.74 152.4,152.4
  pour Bottom: 78.74,152.4 78.74,78.74 152.4,78.74 152.4,152.4
N$10
  Top 0.406: U$23.14 193.88,109.02 193.57,109.02 191.82,110.77 187.17,110.77 185.65,112.29 185.65,112.75 187.94,115.04 191.75,115.04 193.12,113.67 C1_1.2
SCL  (via drill 0.51)
  Top 0.406: U$9.P$1 187.94,58.45 187.94,62.87 X3.3 | v187.25,10.36 188.85,8.76 U$5.4 | v187.25,26.59 U$4.2
  Bottom 0.406: v187.25,10.36 v187.25,26.59 187.32,26.75 187.94,27.36 187.94,58.37 U$9.P$1
SCL1  (via drill 0.51)
  Top 0.406: U$27.P$1 187.94,135.91 187.94,140.34 X6.3 | v187.25,87.83 188.85,86.23 U$24.4 | v187.25,104.06 U$23.2
  Bottom 0.406: v187.25,87.83 v187.25,104.06 187.32,104.22 187.94,104.83 187.94,135.84 U$27.P$1
SDI  (via drill 0.51)
  Top 0.406: v185.42,27.13 186.87,25.68 187.63,25.68 188.32,26.36 188.85,26.36 U$4.3 | v190.14,9.3 192.13,7.32 U$5.6
  Bottom 0.406: v190.14,9.3 187.02,9.3 185.5,10.82 185.5,26.98 v185.42,27.13 U$8.P$1 X3.2
SDI1  (via drill 0.51)
  Top 0.406: v185.42,104.6 186.87,103.15 187.63,103.15 188.32,103.83 188.85,103.83 U$23.3 | v190.14,86.77 192.13,84.78 U$24.6
  Bottom 0.406: v190.14,86.77 187.02,86.77 185.5,88.29 185.5,104.44 v185.42,104.6 U$26.P$1 X6.2
SDO  (via drill 0.51)
  Top 0.406: U$7.P$1 182.91,58.45 182.91,62.87 X3.1 | v193.88,14.33 193.88,7.32 U$5.7 | 189.15,22.25 189.15,24.31 188.93,24.54 U$4.4 | 189.15,22.25 v189.15,19.05 | v182.91,28.35 189,22.25 189.15,22.25
  Bottom 0.406: v189.15,19.05 v193.88,14.33 | v182.91,28.35 182.91,58.37 U$7.P$1
SDO1  (via drill 0.51)
  Top 0.406: U$25.P$1 182.91,135.91 182.91,140.34 X6.1 | v193.88,91.8 193.88,84.78 U$24.7 | 189.15,99.72 189.15,101.78 188.93,102.01 U$23.4 | 189.15,99.72 v189.15,96.52 | v182.91,105.82 189,99.72 189.15,99.72
  Bottom 0.406: v189.15,96.52 v193.88,91.8 | v182.91,105.82 182.91,135.84 U$25.P$1
SPI_CLK
  Top 0.406: X1.1 49.53,58.98 SPI_CLK.P$1 49.61,58.75 35.36,44.5 35.36,40.77 ADC1.13
SPI_CLK1
  Top 0.406: X4.1 49.53,136.45 SPI_CLK1.P$1 49.61,136.22 35.36,121.97 35.36,118.24 ADC2.13
SPI_CS1
  Top 0.406: X1.4 57.15,58.98 SPI_CS1.P$1 57,58.98 55.32,57.3 54.18,57.3 39.17,42.29 39.17,40.77 ADC1.10
SPI_CS2
  Top 0.406: X4.4 57.15,136.45 SPI_CS2.P$1 57,136.45 55.32,134.77 54.18,134.77 39.17,119.76 39.17,118.24 ADC2.10
SPI_DIN
  Top 0.406: X1.3 54.63,62.48 54.63,58.98 SPI_DIN.P$1 54.48,59.05 37.87,42.44 37.87,40.77 ADC1.11
SPI_DIN1
  Top 0.406: X4.3 54.63,139.95 54.63,136.45 SPI_DIN1.P$1 54.48,136.53 37.87,119.91 37.87,118.24 ADC2.11
SPI_DOUT
  Top 0.406: X1.2 52.05,62.48 52.05,58.98 SPI_DOUT.P$1 52.12,58.75 36.58,43.2 36.58,40.77 ADC1.12
SPI_DOUT1
  Top 0.406: X4.2 52.05,139.95 52.05,136.45 SPI_DOUT1.P$1 52.12,136.22 36.58,120.67 36.58,118.24 ADC2.12
VREF
  Top 0.406: 29.03,29.95 29.79,29.95 U$6.16 | 29.03,29.95 20.34,29.95 VREF_TP.P$1 20.19,29.87 16.08,29.87 14.17,27.96 14.17,25.38 15.62,23.93 16.31,23.93 6103CAP2.1 16.54,23.85 18.14,22.25 21.18,22.25 21.34,22.25 | ADC1.15 32.77,39.78 29.72,36.73 29.72,30.79 29.03,30.1 29.03,29.95 | 21.34,22.25 21.34,21.11 24.38,18.06 U$1.2 | 21.34,22.25 21.34,24.16 5VREF.2
  Bottom 0.406: U$1.20 47.24,17.98 47.02,17.98 44.73,15.7 44.73,15.54 U$1.17 44.58,15.77 43.66,15.77 42.67,16.76 41.15,16.76 39.78,18.14 U$1.14 39.62,17.98 39.4,17.98 37.11,15.7 37.11,15.54 U$1.11 36.96,15.77 35.97,16.76 34.06,16.76 32.92,17.91 32.16,17.91 U$1.8 32,17.98 31.77,17.98 29.49,15.7 29.49,15.54 U$1.5 29.34,15.77 28.35,16.76 26.44,16.76 25.22,17.98 24.38,17.98 U$1.2
VREF1
  Top 0.406: 29.03,107.42 29.79,107.42 U$19.16 | 29.03,107.42 20.34,107.42 VREF_TP1.P$1 20.19,107.34 16.08,107.34 14.17,105.44 14.17,102.84 15.62,101.4 16.31,101.4 6103CAP4.1 16.54,101.32 18.14,99.72 21.18,99.72 21.34,99.72 | ADC2.15 32.77,117.25 29.72,114.2 29.72,108.25 29.03,107.57 29.03,107.42 | 21.34,99.72 21.34,98.58 24.38,95.53 U$21.2 | 21.34,99.72 21.34,101.62 5VREF1.2
  Bottom 0.406: U$21.20 47.24,95.45 47.02,95.45 44.73,93.17 44.73,93.02 U$21.17 44.58,93.24 43.66,93.24 42.67,94.23 41.15,94.23 39.78,95.61 U$21.14 39.62,95.45 39.4,95.45 37.11,93.17 37.11,93.02 U$21.11 36.96,93.24 35.97,94.23 34.06,94.23 32.92,95.38 32.16,95.38 U$21.8 32,95.45 31.77,95.45 29.49,93.17 29.49,93.02 U$21.5 29.34,93.24 28.35,94.23 26.44,94.23 25.22,95.45 24.38,95.45 U$21.2

## Text on the board
tPlace: SDO / SDI / SCL / CS Accelerometer / CS Gyroscope / Int1 Accelerometer / Int2 Accelerometer / Int1 Gyroscope / Int2 Gyroscope | Board must be placed / so that the dotted line / runs along the center / line of the car. | 12V | 3.3V | GND | SDO / SDI / SCL / CS Accelerometer / CS Gyroscope / Int1 Accelerometer / Int2 Accelerometer / Int1 Gyroscope / Int2 Gyroscope | Board must be placed / so that the dotted line / runs along the center / line of the car. | 12V | 3.3V | GND
tValues: GND | 12V | CLK / DOUT / DIN / CS | Blinker Left | Blinker Right | Brake | Analog Digital Converter | Blinker Board | Inertial Measurement Unit | 12V | Blinker Right Back / / Blinker Right Front / / Blinker Left Back / / Blinker Left Front / / Brake Left / / Brake Center / / Brake Right | AGND / / IN1 / / IN2 / / IN3 / / IN4 / / IN5 / / IN6 / / IN7 / / IN8 | GND | GND | 12V | CLK / DOUT / DIN / CS | Blinker Left | Blinker Right | Brake | Analog Digital Converter | Blinker Board | Inertial Measurement Unit | 12V | Blinker Right Back / / Blinker Right Front / / Blinker Left Back / / Blinker Left Front / / Brake Left / / Brake Center / / Brake Right | AGND / / IN1 / / IN2 / / IN3 / / IN4 / / IN5 / / IN6 / / IN7 / / IN8 | GND
bValues: REV 2 4/22/2013 | REV1 4/22/2013 | REV 4 4/22/2013 | REV 4 4/22/2013 | REV 2 4/22/2013 | REV1 4/22/2013
_tNames: X1 | X2 | X3 | ADC1 | R1 | U$3 | U$1 | X2 | X3 | X1 | ADC1 | R1 | U$3 | U$1